# Altium PCB logRTC.PcbDoc
Units mm, origin at the board's own origin, x right, y up, seen from the top; angles counter-clockwise.
Board outline 15.24 x 20.96 mm, 2 copper layers (Top Layer, Bottom Layer); 13 components, 17 nets, 39 pads, 6 vias.
Unrouted connection lines stored in the file: 9.
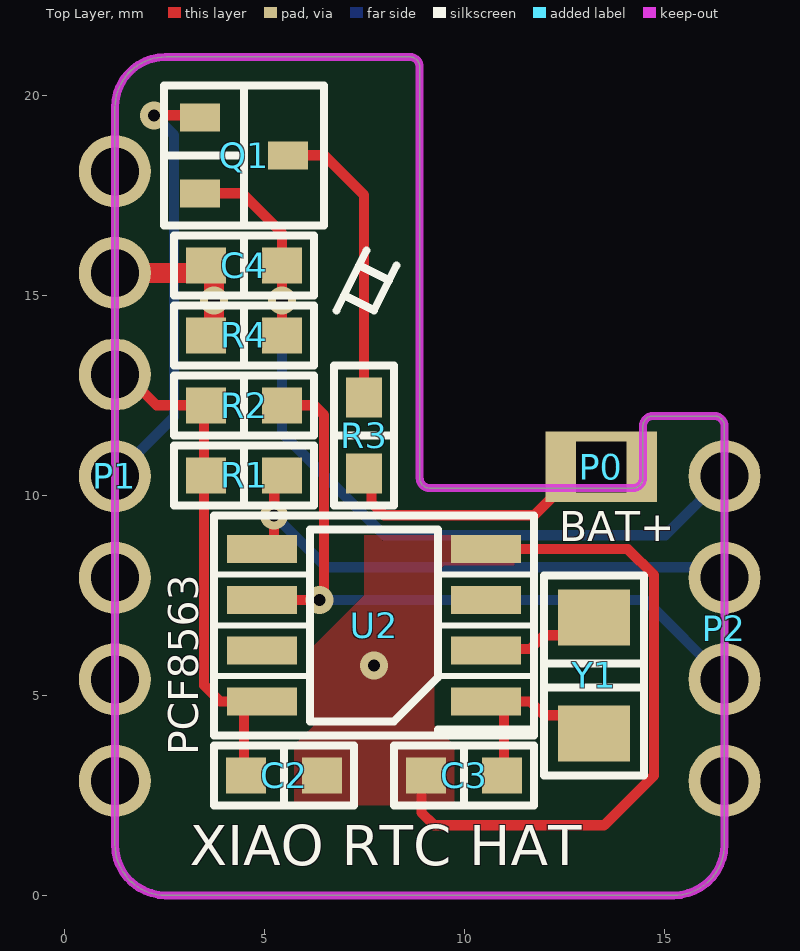
[diagram p0: Top Layer view]
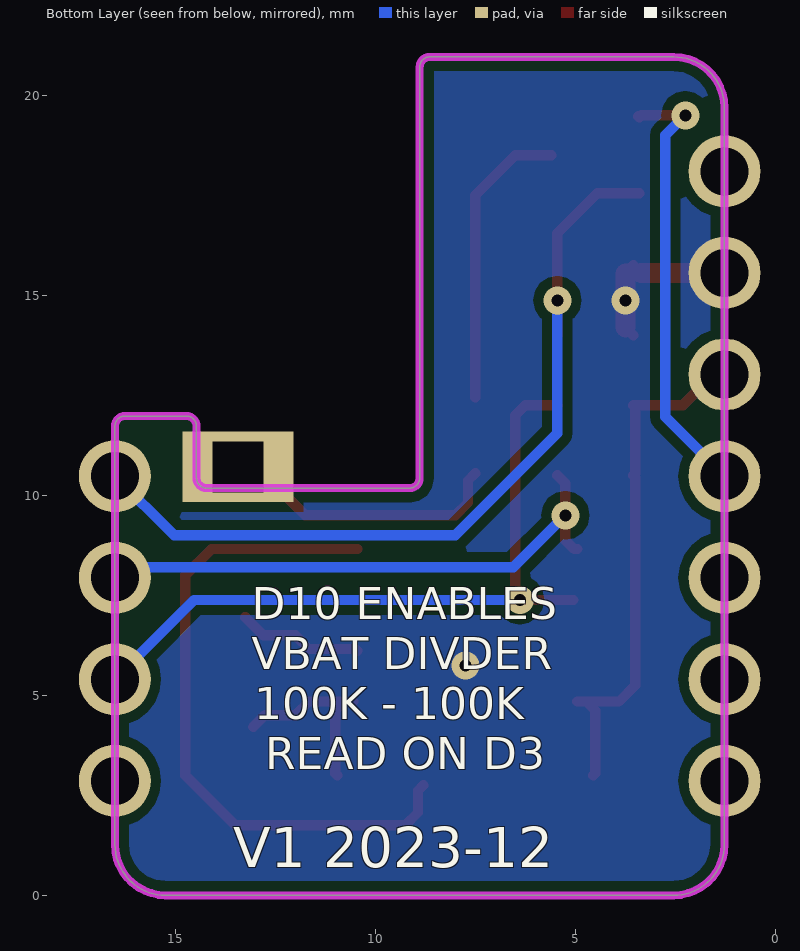
[diagram p1: Bottom Layer view, seen from below]

## Layer stack, top to bottom
Top Solder: solder mask 0.0102, Solder Resist, Dk 3.5
Top Layer: signal copper 0.0356
Dielectric 1: dielectric 0.32, FR-4, Dk 4.8
Bottom Layer: signal copper 0.0356
Bottom Solder: solder mask 0.0102, Solder Resist, Dk 3.5

## Board outline
1.27,1.27 ccw(c2.54,1.27) 2.54,0 15.24,0 ccw(c15.24,1.27) 16.51,1.27 16.51,11.73 ccw(c16.26,11.73) 16.26,11.98 14.72,11.98 ccw(c14.72,11.73) 14.47,11.73 14.47,10.43 cw(c14.22,10.43) 14.22,10.18 9.14,10.18 cw(c9.14,10.43) 8.89,10.43 8.89,20.71 ccw(c8.64,20.71) 8.64,20.96 2.54,20.96 ccw(c2.54,19.69) 1.27,19.69

## Design rules (kind name [scope] priority, off if disabled: settings)
Clearance [All] p1: gap=0.254 ignorepadtopadclearanceinfootprint=FALSE except(0: Arc-Hole Track-Hole SMDPad-Hole THPad-Hole Via-Hole Fill-Hole Poly-Hole Region-Hole Text-Hole; 0.2: Arc-SMDPad Track-SMDPad SMDPad-SMDPad)
MinimumSolderMaskSliver [All] p1: minsoldermaskwidth=0.15
PlaneConnect [All] p1: planeconnectstyle=Direct reliefexpansion=0.508 reliefentries=4 reliefconductorwidth=0.254 reliefairgap=0.254
PolygonConnect [All] p1: connectstyle=Direct reliefconductorwidth=0.254 reliefentries=4 polygonreliefangle="90 Angle" airgapwidth=0.254
RoomDefinition XIAO-HAT [InComponentClass('XIAO-HAT')] p1: confinementstyle=ConfineIn formatcopy=TRUE lockcomponents=FALSE outline -106.68,-83.185 -55.88,-83.185 -55.88,-57.785 -106.68,-57.785
RoutingVias [All] p1: holewidth=0.711 width=1.27 viastyle="Through Hole" minholewidth=0.711 minwidth=1.27 maxholewidth=0.711 maxwidth=1.27
SilkToSilkClearance [All] p1: silktosilkclearance=0.2
SilkToSolderMaskClearance [IsPad] p1: minsilkscreentomaskgap=0.15 clearancetoexposedcopper=TRUE
SolderMaskExpansion [All] p1: expansion=0.102 istentingtop=FALSE
Width [All] p1: maxlimit=2 minlimit=0.2 preferedwidth=0.254 minimp=50.000000 maximp=50.000000 favimp=50.000000
26 further rules are at their usual default settings.

## Classes and differential pairs
component class XIAO-RTC: C2 C3 C4 P0 P1 P2 Q1 R1 R2 R3 U2 Y1

## Components (designator, comment, footprint, x,y, rotation, side; value= is the part's Value field where it differs from the comment)
C2 "Capacitor" 0603CM 5.5,3 r0 top value=100n
C3 "Capacitor" 0603CM 10,3 r180 top value=22p
C4 "Capacitor" 0603CM 4.5,15.75 r180 top value=100n
P0 "VBAT" XIAO-BATCON 13.43,10.71 r0 top
P1 "7x2.54mm" 7P-2.54mm-EDGE 1.27,10.48 r270 top locked
P2 "4x2.54mm" 4P-2.54mm-EDGE 16.51,6.67 r270 top
Q1 "3400" "SOT23-3 M" 4.5,18.5 r270 top value=N-FET
R1 "Resistor" 0603RM 4.5,10.5 r180 top value=10K
R2 "Resistor" 0603RM 4.5,12.25 r180 top value=10K
R3 "Resistor" 0603RM 7.5,11.5 r270 top value=100K
R4 "Resistor" 0603RM 4.5,14 r0 top value=100K
U2 "PCF8563" "SOP-8 M" 7.75,6.75 r90 top
Y1 "Oscillator" "FC135 M" 13.25,5.5 r270 top value=32.768kHz

## Footprints (in the part's own frame and the unit in brackets; to place one, negate y for a bottom-side part, rotate by r counter-clockwise, add the part's x,y. Pads: shape width x height; smd on the part's side, far side on the other; paste and mask are expansions set on the pad)
4P-2.54mm-EDGE [mm] "7-pin 2.54mm thru hole general footprint"
  round 1.8 hole 1.2 mask+0: 1(-3.81,0) 2(-1.27,0) 3(1.27,0) 4(3.81,0)
7P-2.54mm-EDGE [mm] "7-pin 2.54mm thru hole general footprint"
  round 1.8 hole 1.2 mask+0: 1(-7.62,0) 2(-5.08,0) 3(-2.54,0) 4(0,0) 5(2.54,0) 6(5.08,0) 7(7.62,0)
0603CM [mm] "0603 capacitor for manual soldering"
  rect 1x0.9 smd mask+0.05: 1(-0.95,0) 2(0.95,0)
  silkscreen extent -1.75,-0.75 1.75,0.75, body extent -0.85,-0.45 0.85,0.45, height 0.9
0603RM [mm] "0603 resistor for manual soldering"
  rect 1x0.9 smd mask+0.05: 1(-0.95,0) 2(0.95,0)
  silkscreen extent -1.75,-0.75 1.75,0.75, body extent -0.85,-0.45 0.85,0.45, height 0.55
"FC135 M" [mm] "1206 oscillator for manual soldering"
  rect 1.4x1.8 smd mask+0.05: 1(-1.45,0) 2(1.45,0)
  silkscreen extent -2.5,-1.25 2.5,1.25, body extent -1.6,-0.75 1.6,0.75, height 0.9
"SOP-8 M" [mm] "SOP-8 for manual soldering"
  rect 0.7x1.75 smd mask+0.05: 1(-1.905,-2.8) 2(-0.635,-2.8) 3(0.635,-2.8) 4(1.905,-2.8) 5(1.905,2.8) 6(0.635,2.8) 7(-0.635,2.8) 8(-1.905,2.8)
  silkscreen extent -2.75,-4 2.75,4, body extent -2.45,-3 2.45,3, height 1.75
"SOT23-3 M" [mm] "SOT23-3 for manual soldering"
  rect 0.7x1 smd mask+0.05: 1(-0.95,-1.1) 2(0.95,-1.1) 3(0,1.1)
  silkscreen extent -1.75,-2 1.75,2, body extent -1.45,-1.2 1.45,1.2, height 1.1
XIAO-BATCON [mm] "XIAO dev board battery connector"
  rect 2.78x1.76 hole 1.26 square mask+0: 1(0,0)

## Part data
C2 C4: "Capacitor 100nF ±10% 50V", JLC Code=C14663, Component=CC0603KRX7R9BB104
C3: "Capacitor 22pF ±5% 50V", JLC Code=C1653, Component=CL10C220JB8NNNC
P0: library part "1-pin Header", "BAT+ special pin"
P1: library part "7-pins Header", "General 7-pin connection", Function="XIAO CON"
P2: library part "4-pins Header", "General 4-pin connection"
Q1: library part MOSFET-N, "MOSFET N-channel 30V 5.7A", JLC Code=C20917, Component=AO3400A, Function="VBAT-ADC enable"
R1 R2: "Resistor 10kΩ ±1% 100mW", JLC Code=C25804, Component=0603WAF1002T5E
  R1: Function="SDA pull-up"
  R2: Function="SCL pull-up"
R3 R4: "Resistor 100kΩ ±1% 100mW", JLC Code=C25803, Component=0603WAF1003T5E
U2: library part RTC-8563, "IC real-time clock with alarm interrupt", JLC Code=C7440, Component=PCF8563T/5,518, Function=RTC
Y1: library part XO-2, "Crystal oscillator 32.768kHz 20ppm 12.5pF", JLC Code=C32346, Component=Q13FC1350000400, Function="RTC XO"

## Via types
v1: diameter 0.7, hole 0.3, Top Layer to Bottom Layer, tented both sides, 6 vias

## Nets (pads, with @x,y where several pads share a name; then routed paths per layer and width w, separated by ;. In a path a pad name is that pad's centre, name@x,y a point inside that pad or via, vN(x,y) a via of type N, cw(c..) or ccw(c..) an arc to the next point about the centre after c; other vN are vias at no path point)
3V3: C2.1 P1.3 R1.2 R2.2 U2.8 | length 13.2
  Top Layer w0.254: P1.3 1.542,13.02 2.312,12.25 3.25,12.25 R2.2 3.5,12.2 3.5,10.55 R1.2 3.5,10.45 3.5,5.25 3.905,4.845 U2.8@4.723,4.845 ; C2.1 4.5,3.05 4.5,4.622 U2.8@4.723,4.845 ; U2.8 U2.8@4.723,4.845
BAT+: P0.1 R3.2 | length 6.4
  Top Layer w0.254: R3.2 7.682,10.368 7.682,9.818 8,9.5 11.75,9.5 P0.1@12.75,10.5
CLK: U2.7
D3/A3: C4.1 P2.1 Q1.2 R4.2 | length 21.1
  Top Layer w0.254: Q1.2 4.45,17.55 5.45,16.55 C4.1 v1(5.45,14.875) R4.2
  Bottom Layer w0.254: v1(5.45,14.875) 5.45,11.55 8,9 15.03,9 P2.1
D4/SDA: P2.2 R1.1 U2.5 | length 13.9
  Top Layer w0.254: U2.5 5.027,8.655 5.25,8.878 v1(5.25,9.5) ; v1@5.252,9.502 5.252,10.302 R1.1
  Bottom Layer w0.254: v1(5.25,9.5) 6.55,8.2 P2.2@16.5,8.2 ; P2.2@16.5,8 16.5,7.95 P2.2
D5/SCL: P2.3 R2.1 U2.6 | length 18.1
  Top Layer w0.254: U2.6@5.05,7.385 v1(6.385,7.385) ; R2.1 6.25,12.25 6.5,12 v1@6.5,7.385
  Bottom Layer w0.254: v1(6.385,7.385) 14.525,7.385 P2.3
D6/TX: P2.4
D7/RX: P1.7
D8/SCK: P1.6
D9/MISO: P1.5
D10/MOSI: P1.4 Q1.1 | length 10.4
  Top Layer w0.254: v1(2.25,19.5) 3.35,19.5 Q1.1 Q1.1@3.427,19.477
  Bottom Layer w0.254: P1.4@1.751,10.961 2.75,11.96 2.75,19 v1(2.25,19.5)
GND: C2.2 C3.2 C4.2 P1.2 R4.1 U2.4 | length 20.4
  Top Layer w0.254: C4.2@3.36,15.56 C4.2 C4.2@3.75,15.55 ; R4.1 R4.1@3.75,14.2 ; C3.2@8.8,2.75 8.932,2.618 8.932,2.068 9.25,1.75 13.5,1.75 14.75,3 14.75,8 14.095,8.655 U2.4@10.45,8.655
  Top Layer w0.5: P1.2@1.941,15.56 C4.2@3.36,15.56 ; R4.1@3.75,14.2 v1(3.75,14.875) C4.2@3.75,15.55
  other v1: 7.75,5.75
INT: U2.3
NetC3_1: C3.1 U2.1 Y1.2 | length 4.7
  Top Layer w0.254: U2.1 U2.1@10.777,4.845 ; C3.1 11,3.05 11,4.622 U2.1@10.777,4.845 ; Y1.2@13.05,4.21 12.76,4.5 12,4.5 11.657,4.843 10.779,4.843 U2.1@10.777,4.845
NetQ1_3: Q1.3 R3.1 | length 7.4
  Top Layer w0.254: Q1.3 6.5,18.5 7.5,17.5 R3.1
NetU2_2: U2.2 Y1.1 | length 3.1
  Top Layer w0.254: U2.2@10.45,6.115 10.492,6.157 11.657,6.157 12,6.5 12.8,6.5 Y1.1
VUSB: P1.1

## Polygon pours and split planes (outlines as drawn)
GND on Bottom Layer "GND_L02_P001" (solid, remove dead copper, pour order 1): 1.25,0 16.5,0 16.5,10.18 9.14,10.18 8.89,10.43 8.89,20.96 1.29,20.96 1.25,21
GND on Top Layer "GND_L01_P000" (solid, pour order 0): 5.75,2.25 5.75,3.75 6.25,4.25 6.25,6.25 7.5,7.5 7.5,9 11.25,9 11.25,8.25 9.5,8.25 9.25,8 9.25,4.25 9.75,3.75 9.75,2.25

## Keep-outs
Keep-Out Layer:
  the board outline again, w0.2

## Silkscreen, mask and mechanical layers (free items; w line width, h text height)
Top Overlay:
  lines w0.2: 6.813,14.625 7,15 ; 7.563,16.125 7.375,15.75 ; 8.313,15.75 8.125,15.375 ; 7,15 7.375,15.75 ; 7,15 7.75,14.625 8.125,15.375 ; 7.375,15.75 8.125,15.375
  text "BAT+" at 12.375,8.85 h0.75
  text "PCF8563" at 3.35,3.501 h0.75 r90
  text "XIAO RTC HAT" at 3.142,0.75 h1
Bottom Overlay:
  text "D10 ENABLES" at 13.089,6.9 h0.8
  text "VBAT DIVDER" at 13.089,5.65 h0.8
  text "100K - 100K" at 13.022,4.4 h0.8
  text "READ ON D3" at 12.755,3.15 h0.8
  text "V1 2023-12" at 13.555,0.7 h1